# EAGLE board RasPi-BplusHAT (EAGLE 7.3.0)
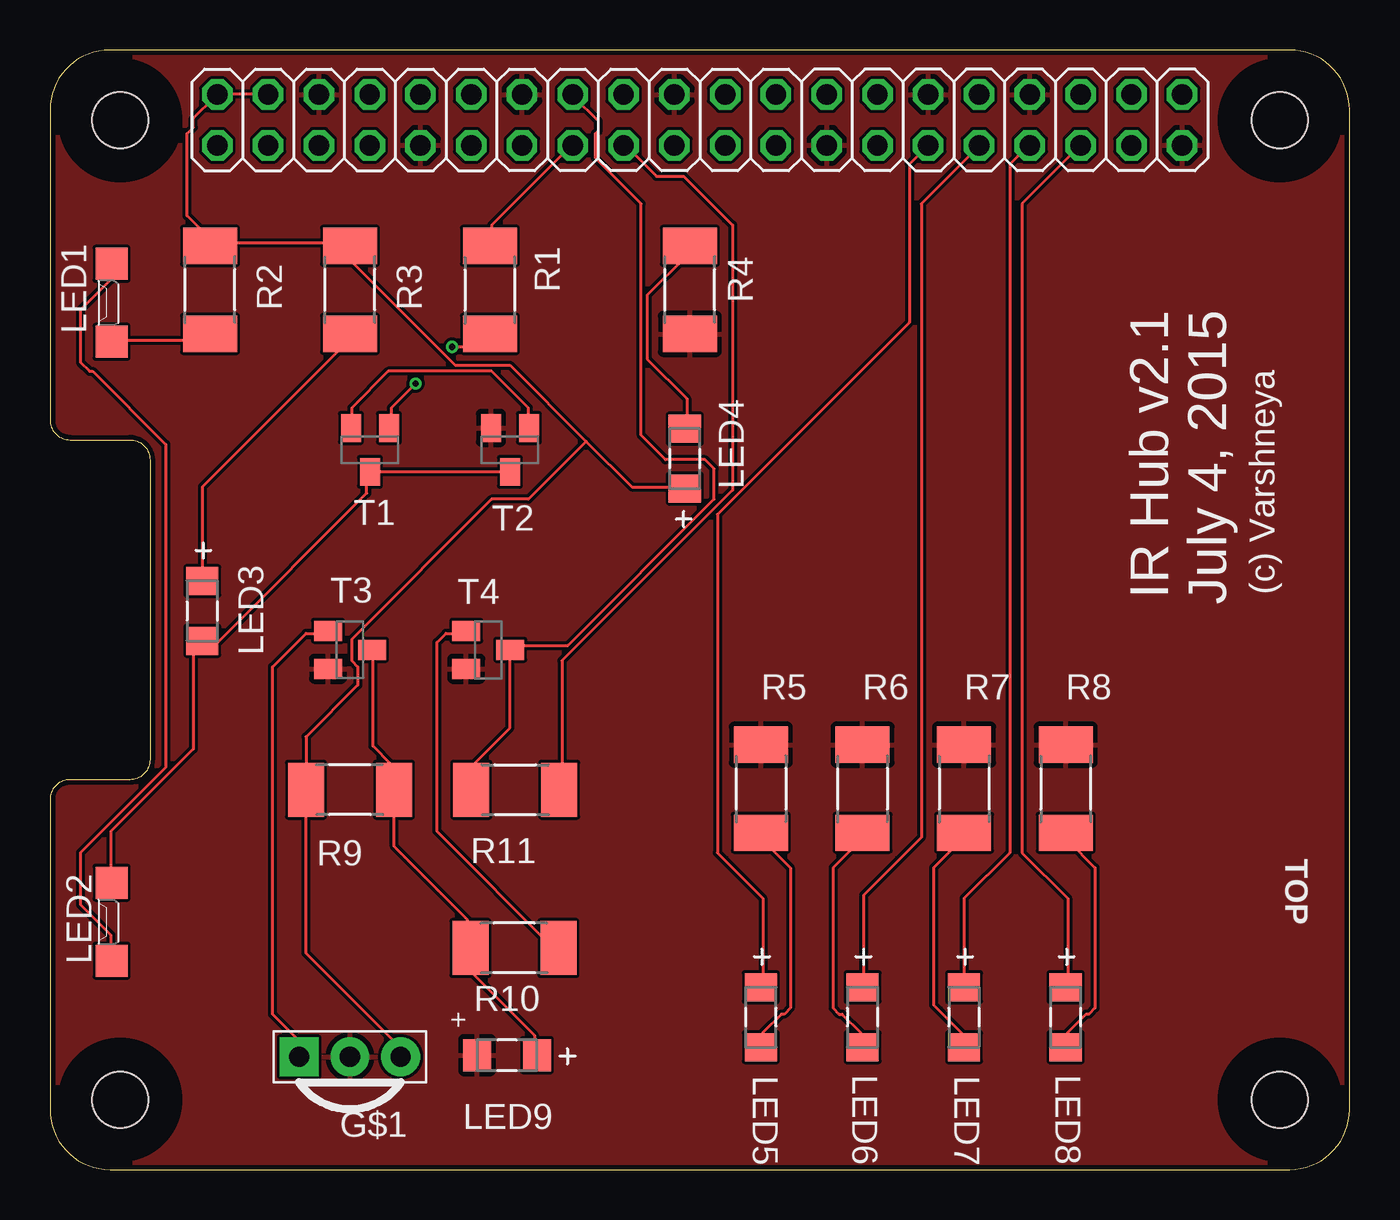
[diagram p0: board, top side]
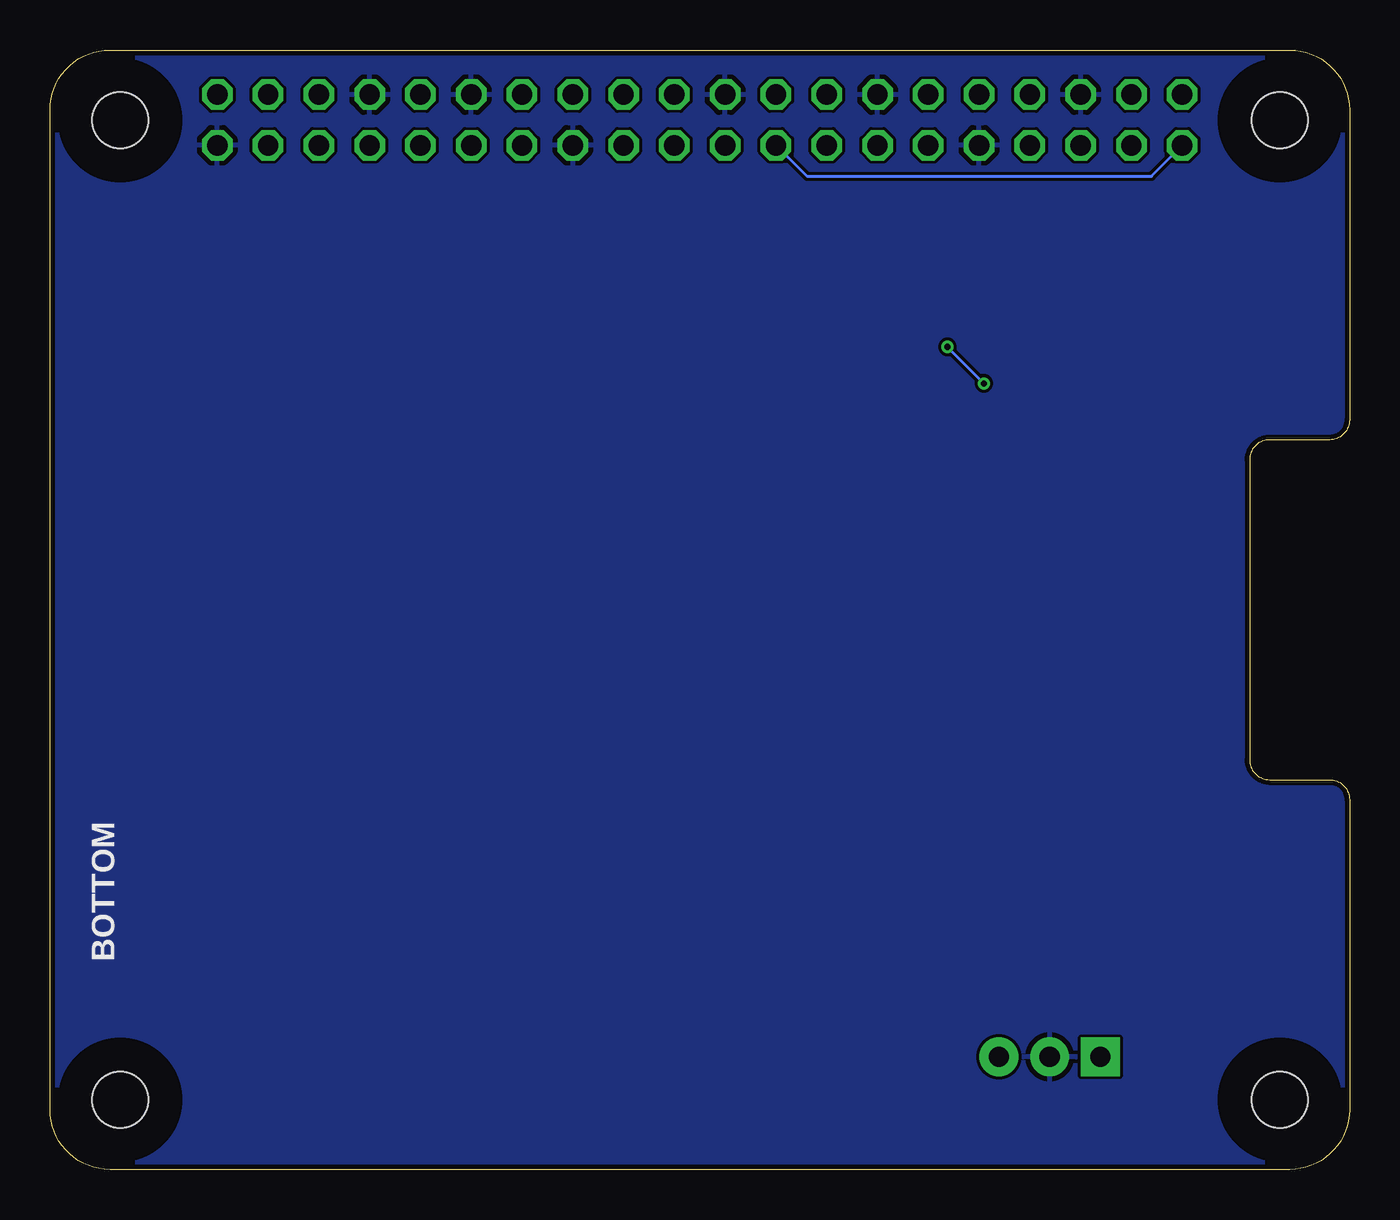
[diagram p1: board, bottom side, seen from below]

Size 65 x 56 mm. Coordinates in mm from the lower left corner, seen from the top.
Outline: 0,3 arc90 3,0 62,0 arc90 65,3 65,53 arc90 62,56 3,56 arc90 0,53 0,37.5 arc90 1,36.5 4,36.5 arc-90 5,35.5 5,20.5 arc-90 4,19.5 1,19.5 arc90 0,18.5 0,3
Copper layers (1*16): Top 0.035mm / dielectric 1.5mm / Bottom 0.035mm
Design rules "ITEADstudio_DRC": minimum track width 6mil, minimum drill 12mil, track to track 6mil, track to pad 6mil, pad to pad 6mil, via to via 6mil, smd to smd 0mil, copper to edge 10mil, drill to drill 10mil, minimum pad ring 10mil, minimum via ring 6mil, stop-mask expansion 2mil, vias tented up to drill 100mil, thermal gap 10mil
Holes 2.8 mm at 3.5,3.5 3.5,52.5 61.5,52.5 61.5,3.5
tRestrict: area 1.9,51 to 5,54; area 60,51 to 63,54; area 60,1.9 to 63,5; area 1.9,1.9 to 5,5
bRestrict: area 1.9,1.9 to 5,5; area 1.9,51 to 5,54; area 60,1.9 to 63,5; area 60,51 to 63,54

## Footprints (pad centres in the part's own frame; a part is rotated, then mirrored left to right if it is on the bottom)
PNA460XM = drill 1.016 pad 1.93 square: 1 -2.54,0 | drill 1.016 pad 1.93: 2 0,0; 3 2.54,0
2X20 = drill 1.016 octagon: 1 -24.13,-1.27; 2 -24.13,1.27; 3 -21.59,-1.27; 4 -21.59,1.27; 5 -19.05,-1.27; 6 -19.05,1.27; 7 -16.51,-1.27; 8 -16.51,1.27; 9 -13.97,-1.27; 10 -13.97,1.27; 11 -11.43,-1.27; 12 -11.43,1.27; 13 -8.89,-1.27; 14 -8.89,1.27; 15 -6.35,-1.27; 16 -6.35,1.27; 17 -3.81,-1.27; 18 -3.81,1.27; 19 -1.27,-1.27; 20 -1.27,1.27; 21 1.27,-1.27; 22 1.27,1.27; 23 3.81,-1.27; 24 3.81,1.27; 25 6.35,-1.27; 26 6.35,1.27; 27 8.89,-1.27; 28 8.89,1.27; 29 11.43,-1.27; 30 11.43,1.27; 31 13.97,-1.27; 32 13.97,1.27; 33 16.51,-1.27; 34 16.51,1.27; 35 19.05,-1.27; 36 19.05,1.27; 37 21.59,-1.27; 38 21.59,1.27; 39 24.13,-1.27; 40 24.13,1.27
MICRO-SIDELED = smd 1.6 x 1.6: A 0,1.95; C 0,-1.95
LED_597-3401-407F = smd 1.397 x 1.6: 1 -1.499,0; 2 1.499,0
LED_597-3311-407F = smd 1.397 x 1.6: 1 -1.499,0; 2 1.499,0
LED_597-3111-407F = smd 1.397 x 1.6: 1 -1.499,0; 2 1.499,0
R2010 = smd 1.8 x 2.7: 1 -2.2,0; 2 2.2,0
SOT23-BEC = smd 1 x 1.4: B -0.95,-1.1; C 0,1.1; E 0.95,-1.1

## Placement (x,y rotation side)
G$1  PNA460XM  [PNA460XM]  15,5.63 0 top
JP1  [2X20]  32.5,52.5 0 top
LED1  IR  [MICRO-SIDELED]  3.08,43.36 180 top
LED2  IR  [MICRO-SIDELED]  3.08,12.4 180 top
LED3  597-3401-407F  [LED_597-3401-407F]  7.62,27.94 90 top
LED4  597-3311-407F  [LED_597-3311-407F]  31.75,35.56 270 top
LED5  597-3311-407F  [LED_597-3311-407F]  35.56,7.62 90 top
LED6  597-3401-407F  [LED_597-3401-407F]  40.64,7.62 90 top
LED7  597-3111-407F  [LED_597-3111-407F]  45.72,7.62 90 top
LED8  597-3401-407F  [LED_597-3401-407F]  50.8,7.62 90 top
LED9  597-3401-407F  [LED_597-3401-407F]  22.86,5.71 0 top
R1  1K  [R2010]  22,44 270 top
R2  10Ohm  [R2010]  8,44 90 top
R3  100Ohm  [R2010]  15,44 90 top
R4  1K  [R2010]  32,44 90 top
R5  100Ohm  [R2010]  35.56,19.05 270 top
R6  100Ohm  [R2010]  40.64,19.05 270 top
R7  100Ohm  [R2010]  45.72,19.05 270 top
R8  100Ohm  [R2010]  50.8,19.05 270 top
R9  1K  [R2010]  15,19 180 top
R10  10K  [R2010]  23.23,11.09 180 top
R11  1K  [R2010]  23.27,19 0 top
T1  2N4401  [SOT23-BEC]  16,36 180 top
T2  2N4401  [SOT23-BEC]  23,36 180 top
T3  2N4401  [SOT23-BEC]  15,26 270 top
T4  2N4401  [SOT23-BEC]  21.92,25.99 270 top

## Library data of the parts
G$1 = adafruit; MPN: TSDP34138; OC_NEWARK: 68X1938
JP1 = adafruit; OC_NEWARK: unknown
LED1 LED2 = led; MPN: VSMB10940X01; OC_NEWARK: 64X9433
LED3 LED6 LED8 LED9 = Dialight_By_element14_Batch_1; COLOR: Yellow; MPN: 597-3401-407F; OC_FARNELL: 1519495; OC_NEWARK: 30K4970; PACKAGE: 1206-Yellow LED; SUPPLIER: Dialight
LED4 LED5 = Dialight_By_element14_Batch_1; COLOR: Green; MPN: 597-3311-407F; OC_FARNELL: 1519493; OC_NEWARK: 30K4957; PACKAGE: 1206- Green LED; SUPPLIER: Dialight
LED7 = Dialight_By_element14_Batch_1; COLOR: AlGaAs Red; MPN: 597-3111-407F; OC_FARNELL: 1519490; OC_NEWARK: 30K4900; PACKAGE: 1206-RED LED; SUPPLIER: Dialight
R1 R4 R9 R11 = adafruit; MF: VISHAY/DALE; MPN: CRCW08051K00JNEA; OC_NEWARK: 52K9725
R2 = adafruit; MF: OUTSOURCE ITEM; MPN: RP2012S-100-F; OC_NEWARK: 28K1497
R3 R5-R8 = adafruit; MPN: CRCW0805100RJNTA; OC_NEWARK: 57K6355
R10 = adafruit; MF: VISHAY/DALE; MPN: CRCW080510K0JNEB; OC_NEWARK: 65J1362
T1 T2 = transistor-neu-to92; MPN: MMBT4401-TP; OC_NEWARK: 51T4931
T3 T4 = transistor; MPN: MMBT4401-TP; OC_NEWARK: 51T4931

## Nets
+3V3: JP1.1 JP1.17 R11.2
+5V: G$1.3 JP1.2 JP1.4 LED4.2 R2.2 R3.2 R9.2
GND: G$1.2 JP1.6 JP1.9 JP1.14 JP1.20 JP1.25 JP1.30 JP1.34 JP1.39 LED9.1 R4.1 R5.1 R6.1 R7.1 R8.1 T2.E T3.E T4.E
GPIO02: JP1.3
GPIO03: JP1.5
GPIO04: JP1.7
GPIO05: JP1.29 LED5.2
GPIO06: JP1.31 LED6.2
GPIO07: JP1.26
GPIO08: JP1.24
GPIO09: JP1.21
GPIO10: JP1.19
GPIO11: JP1.23
GPIO12: JP1.32
GPIO13: JP1.33 LED7.2
GPIO14: JP1.8
GPIO15: JP1.10
GPIO16: JP1.36
GPIO17: JP1.11
GPIO18: JP1.12
GPIO19: JP1.35 LED8.2
GPIO20: JP1.38
GPIO21: JP1.40
GPIO22: JP1.15 R1.1
GPIO23: JP1.16 R11.1 T4.C
GPIO24: JP1.18
GPIO25: JP1.22
GPIO26: JP1.37
GPIO27: JP1.13
ID_SC: JP1.28
ID_SD: JP1.27
N$2: LED1.A R2.1
N$3: LED1.C LED2.A
N$4: LED2.C LED3.1 T1.C T2.C
N$5: R1.2 T1.B
N$6: LED3.2 R3.1
N$7: LED5.1 R5.2
N$8: G$1.1 T3.B
N$10: LED9.2 R9.1 R10.2 T3.C
N$11: T1.E T2.B
N$14: LED8.1 R8.2
N$16: LED7.1 R7.2
N$17: LED6.1 R6.2
N$21: LED4.1 R4.2
N$23: R10.1 T4.B

## Tracks (layer width: path | path; a pad name or v marks a point on that pad's centre or on a via)
+3V3
  Top 0.152: R11.2 25.6,19.05 25.6,25.45 34.14,33.98 34.14,47.24 31.7,49.68 30.33,49.68 28.8,51.21 JP1.17
  Bottom 0.152: JP1.1 8.38,51.21 9.91,49.68 27.13,49.68 28.65,51.21 JP1.17
+5V
  Top 0.152: G$1.3 17.53,5.64 17.53,6.1 12.8,10.82 12.8,18.9 R9.2 12.8,19.05 12.8,21.64 15.39,24.23 15.39,25.15 15.09,25.45 15.09,26.52 22.1,33.53 23.93,33.53 26.82,36.42 | JP1.4 10.82,53.8 8.38,53.8 JP1.2 8.23,53.65 7.16,52.58 7.16,52.12 6.86,51.82 6.86,47.7 8.23,46.33 | 26.82,36.42 23.01,40.23 20.27,40.23 15.09,45.41 15.09,46.18 R3.2 14.94,46.33 8.23,46.33 | 26.82,36.42 29.11,34.14 31.7,34.14 LED4.2 | 8.23,46.33 8.08,46.33 R2.2 8.23,46.33
GND
  pour Bottom: 0,3 arc90 3,0 62,0 arc90 65,3 65,53 arc90 62,56 3,56 arc90 0,53 0,37.5 arc90 1,36.5 4,36.5 arc-90 5,35.5 5,20.5 arc-90 4,19.5 1,19.5 arc90 0,18.5
  pour Top: 0,3 arc90 3,0 62,0 arc90 65,3 65,53 arc90 62,56 3,56 arc90 0,53 0,37.5 arc90 1,36.5 4,36.5 arc-90 5,35.5 5,20.5 arc-90 4,19.5 1,19.5 arc90 0,18.5
GPIO05
  Top 0.152: LED5.2 35.66,9.14 35.66,13.56 33.38,15.85 33.38,32.77 42.98,42.37 42.98,50.29 43.89,51.21 JP1.29
GPIO06
  Top 0.152: LED6.2 40.69,9.14 40.69,13.72 43.59,16.61 43.59,48.31 46.48,51.21 JP1.31
GPIO13
  Top 0.152: LED7.2 45.72,13.56 48.01,15.85 48.01,50.29 48.92,51.21 JP1.33
GPIO19
  Top 0.152: LED8.2 50.9,9.14 50.9,13.56 48.62,15.85 48.62,48.31 51.51,51.21 JP1.35
GPIO22
  Top 0.152: R1.1 22.1,46.33 22.1,47.24 26.06,51.21 JP1.15
GPIO23
  Top 0.152: R11.1 21.18,19.05 21.18,20.27 23.01,22.1 23.01,25.91 T4.C 23.16,26.06 23.32,26.21 25.91,26.21 33.22,33.53 33.22,35.05 32.77,35.51 30.79,35.51 29.57,36.73 29.57,48.31 27.28,50.6 27.28,51.82 27.43,51.97 27.43,52.43 26.21,53.65 JP1.16
N$2
  Top 0.152: LED1.A 3.2,41.45 7.62,41.45 7.92,41.76 R2.1
N$3
  Top 0.152: LED2.A 3.05,10.52 3.05,11.73 1.52,13.26 1.52,15.85 5.79,20.12 5.79,36.27 2.13,39.93 1.98,39.93 1.52,40.39 1.52,42.98 3.05,44.5 3.05,45.26 LED1.C
N$4
  Top 0.152: T2.C 22.86,34.9 T1.C 15.85,34.9 15.85,33.83 8.38,26.36 7.62,26.36 | 7.62,26.36 7.16,25.91 7.16,21.03 3.05,16.92 3.05,14.48 LED2.C | 7.62,26.36 LED3.1
N$5  (via drill 0.3)
  Top 0.152: v18.29,39.32 17.07,38.1 17.07,37.19 T1.B | v20.12,41.15 21.34,41.15 21.95,41.76 R1.2
  Bottom 0.152: v20.12,41.15 v18.29,39.32
N$6
  Top 0.152: LED3.2 7.62,34.14 14.94,41.45 14.94,41.76 R3.1
N$7
  Top 0.152: LED5.1 35.66,6.25 35.66,6.86 36.58,7.77 36.73,7.77 37.03,8.08 37.03,15.09 35.66,16.46 35.66,16.76 R5.2
N$8
  Top 0.152: T3.B 13.87,26.82 12.8,26.82 11.12,25.15 11.12,7.77 12.34,6.55 12.34,5.64 G$1.1
N$10
  Top 0.152: T3.C 16.15,25.91 16.15,21.18 17.07,20.27 17.07,19.05 R9.1 17.22,18.9 17.22,16.15 20.88,12.5 20.88,11.12 R10.2 21.03,10.97 21.03,9.91 24.23,6.71 24.23,5.79 LED9.2
N$11
  Top 0.152: T1.E 15.09,37.19 15.09,38.1 16.92,39.93 22.1,39.93 23.93,38.1 23.93,37.19 T2.B
N$14
  Top 0.152: LED8.1 50.9,6.25 50.9,6.86 51.82,7.77 51.97,7.77 52.27,8.08 52.27,15.09 50.9,16.46 50.9,16.76 R8.2
N$16
  Top 0.152: LED7.1 45.72,6.71 44.2,8.23 44.2,15.09 45.72,16.61 R7.2
N$17
  Top 0.152: LED6.1 40.54,6.25 40.54,6.86 39.62,7.77 39.47,7.77 39.17,8.08 39.17,15.09 40.54,16.46 40.54,16.76 R6.2
N$21
  Top 0.152: LED4.1 31.85,37.19 31.85,38.56 29.87,40.54 29.87,43.74 31.85,45.72 31.85,46.18 R4.2
N$23
  Top 0.152: T4.B 20.73,26.82 19.81,26.82 19.36,26.36 19.36,16.92 25.3,10.97 R10.1

## Text on the board
tNames: IR Hub v2.1 / July 4, 2015 | (c) Varshneya | TOP | +
bNames: BOTTOM